# Altium PCB RelayNode.PcbDoc
Units mil, origin at the board's own origin, x right, y up, seen from the top; angles counter-clockwise.
Board outline 2335 x 1930 mil, 2 copper layers (Top Layer, Bottom Layer); 24 components, 27 nets, 101 pads, 0 vias.
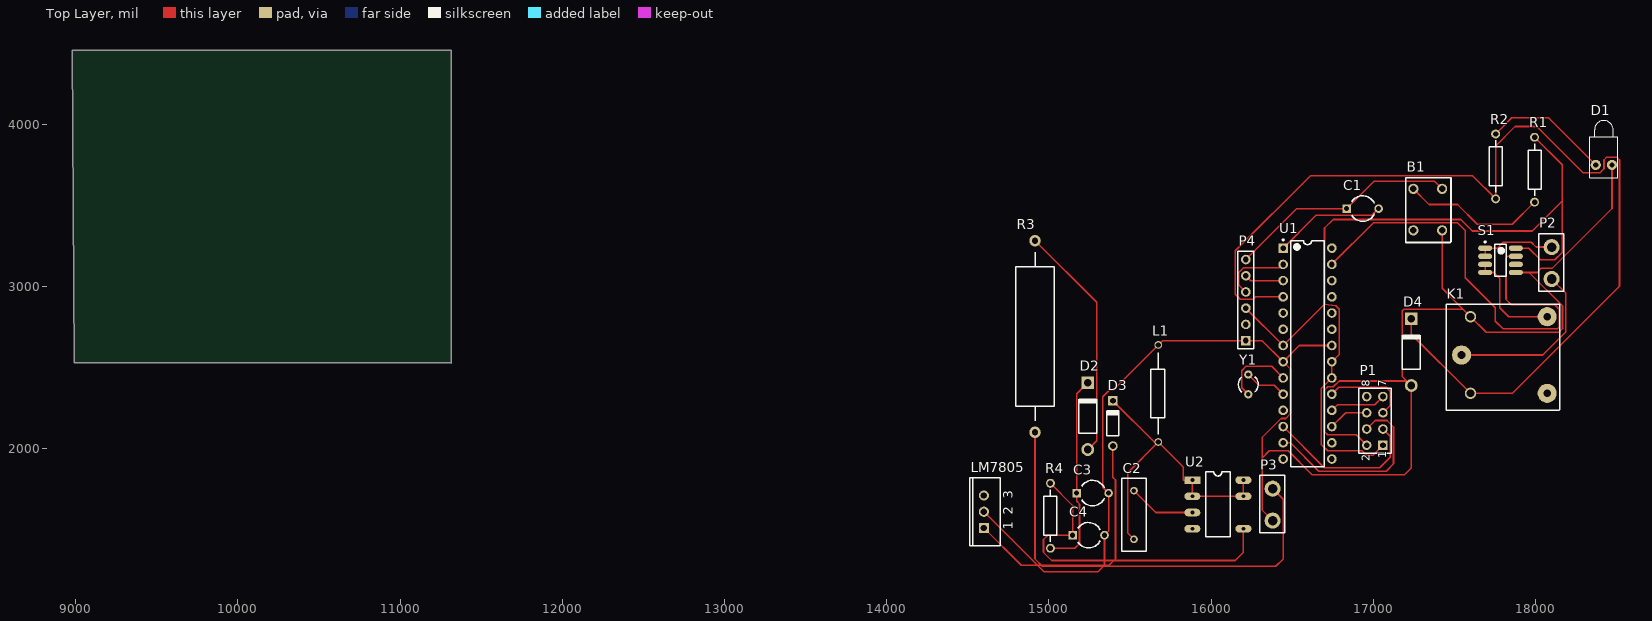
[diagram p0: Top Layer view]
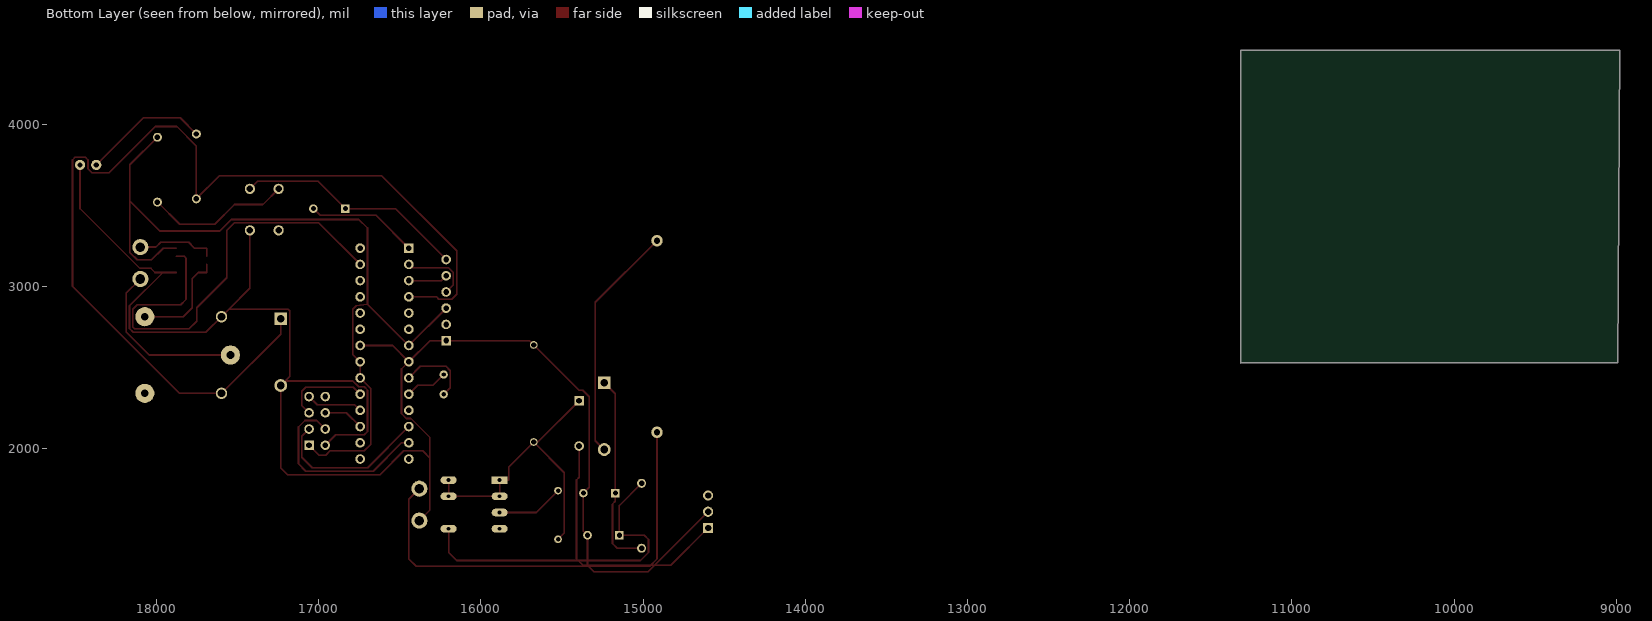
[diagram p1: Bottom Layer view, seen from below]

## Layer stack, top to bottom
Top Layer: signal copper 1.4
Dielectric: dielectric 12.6, FR-4, Dk 4.8
Bottom Layer: signal copper 1.4

## Board outline
8980,4455 11315,4455 11315,2525 11315,2530 8990,2530

## Design rules (kind name [scope] priority, off if disabled: settings)
Clearance [All] p1: gap=10
PolygonConnect [All] p1: connectstyle=Relief reliefconductorwidth=10 reliefentries=4 polygonreliefangle="90 Angle"
RoomDefinition RelayNode [InComponentClass('RelayNode')] p1: confinementstyle=ConfineIn formatcopy=TRUE lockcomponents=FALSE outline 14277.57,1310.39 19497.57,1310.39 19497.57,4045.39 14277.57,4045.39
RoutingLayers [All] p1: top layer_v5=TRUE bottom layer_v5=FALSE
RoutingVias [All] p1: holewidth=28 width=50 viastyle="Through Hole" minholewidth=28 minwidth=50 maxholewidth=28 maxwidth=50
SilkscreenOverComponentPads [All] p1: minsilkscreentomaskgap=10
SolderMaskExpansion [All] p1: expansion=4
Width [All] p1: maxlimit=78.74 minlimit=10 preferedwidth=10
26 further rules are at their usual default settings.

## Components (designator, comment, footprint, x,y, rotation, side; value= is the part's Value field where it differs from the comment)
B1 "Button" Button 17425,3345.91 r90 top
C1 "Cap2" CAPR5-4X5 16935,3480 r0 top
C2 "Cap" RAD-0.3 15525,1590.91 r90 top
C3 "Cap2" CAPR5-4X5 15270,1725.91 r0 top
C4 "Cap2" CAPR5-4X5 15245,1465.91 r0 top
D1 "LED1" LED-1 18422.14,3749.27 r90 top
D2 "Diode 1N4007" DO-41 15240,2200 r90 top
D3 "Diode 1N914" DO-35 15395,2155.91 r90 top
D4 "Diode 1N4001" DO-41 17235,2595 r90 top
K1 "SRD-05VDC-SL-C" SRD-05VDC-SL-C 17600,2340.91 r0 top
L1 "Inductans" "Axial 0.8" 15675,2040.91 r90 top
LM7805 "" TO-220-AB 14600,1610.91 r90 top
P1 "nRF24L01Connector" HDR2X4 17060,2020.91 r90 top
P2 "Screw Terminal" PCBComponent_1 18100,3045.91 r90 top
P3 "Screw Terminal" PCBComponent_1 16380,1555.91 r90 top
P4 "FTDI" HDR1X6 16215,2665.91 r90 top
R1 "Res2" AXIAL-0.4 17995,3720 r90 top
R2 "Res2" AXIAL-0.4 17755,3740 r90 top
R3 "Res2" "Axial 1.0" 14915,2100.91 r90 top
R4 "Res2" AXIAL-0.4 15010,1585.91 r90 top
S1 "ACS712" SOIC127P600X175-8N 17785,3160.91 r0 top
U1 "ATmega328-PU" 28P3 16595,2585.91 r0 top
U2 "LNK302P" "LNK302 - duplicate" 15885,1805.91 r0 top
Y1 "XTAL" R38 16230,2395.91 r0 top

## Footprints (in the part's own frame and the unit in brackets; to place one, negate y for a bottom-side part, rotate by r counter-clockwise, add the part's x,y. Pads: shape width x height; smd on the part's side, far side on the other; paste and mask are expansions set on the pad)
28P3 [mm] "DIP, 28-Leads, Row Spacing 7.62mm, Pitch 2.54mm, Body 34.67x7.3mm"
  rect 1.5x1.5 hole 0.9: 1(-3.81,16.51)
  round 1.5 hole 0.9: 2(-3.81,13.97) 3(-3.81,11.43) 4(-3.81,8.89) 5(-3.81,6.35) 6(-3.81,3.81) 7(-3.81,1.27) 8(-3.81,-1.27) 9(-3.81,-3.81) 10(-3.81,-6.35) 11(-3.81,-8.89) 12(-3.81,-11.43) 13(-3.81,-13.97) 14(-3.81,-16.51) 15(3.81,-16.51) 16(3.81,-13.97) 17(3.81,-11.43) 18(3.81,-8.89) 19(3.81,-6.35) 20(3.81,-3.81) 21(3.81,-1.27) 22(3.81,1.27) 23(3.81,3.81) 24(3.81,6.35) 25(3.81,8.89) 26(3.81,11.43) 27(3.81,13.97) 28(3.81,16.51)
  silkscreen extent -3.93,-17.7 2.65,17.93, body extent -3.6,-17.65 3.6,17.65, height 4.58
"Axial 0.8" [mm]
  round 1.2 hole 0.8: 1(0,0) 2(15.2,0)
  silkscreen extent 1.2,-1.02 14,1.14
"Axial 1.0" [mm]
  round 1.8 hole 1: 1(0,0) 2(30,0)
  silkscreen extent 1.8,-3 28.2,3
AXIAL-0.4 [mm] "Axial Device, Thru-Hole; 2 Leads; 0.4 in Pin Spacing"
  round 1.4 hole 0.85: 1(-5.08,0) 2(5.08,0)
  silkscreen extent -4.06,-1.02 4.06,1.02
Button [mm]
  round 1.6 hole 1: 1(0,4.5) 2(0,0) 3(6.5,4.5) 4(6.5,0)
  silkscreen extent -1.9,-1.4 8.26,5.72
CAPR5-4X5 [mm] "Capacitor; 2 Leads"
  rect 1.35x1.35 hole 0.8: 1(-2.5,0)
  round 1.35 hole 0.8: 2(2.5,0)
  silkscreen extent -1.69,-2 1.82,2
DO-35 [mm] "Diode, Axial; Body 3.8 x 1.9 mm (LxDia. max), Lead Dia. 0.53 mm (max)"
  round 1.5 hole 0.9: 1(-3.55,0)
  rect 1.5x1.5 hole 0.9: 2(3.55,0)
  silkscreen extent -1.95,-0.95 2.05,0.95
DO-41 [mm] "Diode, Axial; Body 5.2 x 2.7 mm (LxDia. max), Lead Dia. 0.86 mm (max)"
  round 2 hole 1.2: 1(-5.23,0)
  rect 2x2 hole 1.2: 2(5.23,0)
  silkscreen extent -2.65,-1.4 2.75,1.4
HDR1X6 [mm] "Connector; Header; 6 Position"
  rect 1.5x1.5 hole 0.9: 1(0,0)
  round 1.5 hole 0.9: 2(2.54,0) 3(5.08,0) 4(7.62,0) 5(10.16,0) 6(12.7,0)
  silkscreen extent -1.27,-1.27 13.97,1.27
HDR2X4 [mm] "Connector; Header; 4x2 Position"
  rect 1.5x1.5 hole 0.9: 1(0,0)
  round 1.5 hole 0.9: 2(0,2.54) 3(2.54,0) 4(2.54,2.54) 5(5.08,0) 6(5.08,2.54) 7(7.62,0) 8(7.62,2.54)
  silkscreen extent -1.27,-1.27 8.89,3.81
LED-1 [mm] "LED; 2 Leads"
  round 1.6 hole 0.8: 1(0,1.27) 2(0,-1.27)
  silkscreen extent -2,-2.2 6.95,2.2
"LNK302 - duplicate" [mm]
  rect 2.5x1.2 hole 0.6: 1(0,0)
  oval 2.5x1.2 hole 0.6: 2(0,-2.54) 3(0,-5.08) 4(0,-7.62) 5(8,-7.62) 7(8,-2.54) 8(8,0)
  silkscreen extent 2.08,-8.89 5.91,1.27
PCBComponent_1 [mm]
  round 2.524 hole 1.5: 1(0,0) 2(5,0)
  silkscreen extent -1.9,-1.91 7.11,2.03
R38 [mm] "Crystal, Thru-Hole; 2 Leads; Body 3.1 x 8.2 mm (Dia.xH)"
  round 1.3 hole 0.7: 1(0,1.55) 2(0,-1.55)
  silkscreen extent -1.55,-1.19 1.55,1.17
RAD-0.3 [mm] "Radial Cap, Thru-Hole; 2 Leads; 0.3 in Pin Spacing"
  round 1.2 hole 0.7: 1(-3.81,0) 2(3.81,0)
  silkscreen extent -5.71,-1.91 5.72,1.91
SOIC127P600X175-8N [mm] "SOIC, 8-Leads, Body 5,0x4,0mm (max), Pitch 1,27mm, IPC Medium Density"
  oval 2.2x0.85 smd: 1(-2.4,0.635) 1(-2.4,1.905) 3(-2.4,-1.905) 3(-2.4,-0.635) 5(2.4,-1.905) 6(2.4,-0.635) 7(2.4,0.635) 8(2.4,1.905)
  silkscreen extent -2.52,-2.5 0.9,3, body extent -2,-2.5 2,2.5, height 1.75
SRD-05VDC-SL-C [mm]
  round 3 hole 1.2: 1(-1.4,6) 2(12,12) 3(12,0)
  round 1.8 hole 1.2: 4(0,12) 5(0,0)
  silkscreen extent -3.81,-2.67 13.97,13.97
TO-220-AB [mm] "TO, Thru-Hole, Vertical, Heatsink Mounted; 3 In-Line Leads; Pitch 2.54 mm"
  rect 1.6x1.6 hole 1: 1(-2.54,0)
  round 1.6 hole 1: 2(0,0) 3(2.54,0)
  silkscreen extent -5.35,-2.55 5.35,2.25

## Part data
C1 C2 C3 C4: "Capacitor"
D1: "Typical RED GaAs LED"
D2 D4: "1 Amp General Purpose Rectifier"
D3: "High Conductance Fast Diode"
LM7805: library part LM7805
P2 P3: "Screw Terminal Block Connector 2 Pins"
P4: library part "Header 6", "Header, 6-Pin"
R1 R2 R3 R4: "Resistor"
U1: "8-bit AVR Microcontroller, 32KB Flash, 1KB EEPROM, 2KB SRAM, 28-pin PDIP, Industrial Grade (-40°C to 85°C)"
U2: "LNK302P DIP"
Y1: "Crystal Oscillator"

## Nets (pads, with @x,y where several pads share a name; then routed paths per layer and width w, separated by ;. In a path a pad name is that pad's centre, name@x,y a point inside that pad or via, vN(x,y) a via of type N, cw(c..) or ccw(c..) an arc to the next point about the centre after c; other vN are vias at no path point)
GND: B1.2 C3.2 C4.2 D1.2 D4.1 K1.4 L1.2 LM7805.2 P1.2 P3.1 P4.1 S1.5 U1.8 U1.22 | length 10888.5
  Top Layer w10: LM7805.2 14970.91,1240 15303.43,1240 15343.43,1280 C4.2 15368.43,1490.91 C3.2 15333,1761.33 15333,2320 15373,2360 15395.67,2360 L1.2 15701.58,2665.91 P4.1 16315,2665.91 U1.8 ; P3.1 16315,1620.91 16315,1941 ; U1.22 16545,2635.91 U1.8 ; P1.2 16895.91,2085 16720,2085 16700,2105 16700,2361 16720,2381 16754,2381 16790,2417 17207.09,2417 ; B1.2 17425,2988.35 17553.35,2860 ; S1.5 17961.09,3085.91 ; D1.2 18472.14,3480.14 18103,3111 18035,3111 18009.91,3085.91 17961.09,3085.91 ; 16315,1941 16315,2069 16432,2186 16460,2186 16490,2216 16490,2490.91 U1.8 ; 16315,1941 16360,1986 16476,1986 16622,1840 17195,1840 17235,1880 D4.1 17207.09,2417 ; 17207.09,2417 17180,2444.09 17180,2850 17190,2860 17553.35,2860 ; 17553.35,2860 K1.4 17696.35,2717 18144,2717 18167,2740 18167,2880 17961.09,3085.91
NetB1_3: B1.3 R1.1 | length 894.5
  Top Layer w10: B1.3 17344.65,3505 17520,3505 17642,3383 17858,3383 R1.1
NetB1_4: B1.4 C1.1 P4.6 | length 1429.6
  Top Layer w10: P4.6 16529.09,3480 C1.1 17005.57,3649 17377.81,3649 B1.4
NetC1_2: C1.2 U1.1 | length 689.5
  Top Layer w10: U1.1 16647.13,3438.03 16991.46,3438.03 C1.2
NetC2_1: C2.1 D3.2 L1.1 U2.1 U2.2 U2.7 U2.8 | length 1949.1
  Top Layer w10: D3.2 15649.76,2040.91 L1.1 ; C2.1 15486,1479.91 15486,1851.91 L1.1 ; U2.8 U2.7 U2.2 U2.1 15830,1805.91 15830,1885.91 L1.1
NetC2_2: C2.2 U2.3 | length 415.9
  Top Layer w10: C2.2 15660,1605.91 U2.3
NetC3_1: C3.1 D2.2 R4.1 | length 1217.5
  Top Layer w10: R4.1 15159.91,1385.91 15189,1415 15189,1658 15171.57,1675.43 C3.1 15171.57,2337.48 D2.2
NetC4_1: C4.1 R4.2 U2.5 | length 2067.2
  Top Layer w10: R4.2 15146.57,1649.33 C4.1 14992.91,1465.91 14967,1440 14967,1360 15017,1310 16149,1310 16199,1360 16199,1505.91 U2.5
NetD1_1: D1.1 R2.2 | length 779
  Top Layer w10: R2.2 17855,4040 18081.41,4040 D1.1
NetD2_1: D2.1 R3.2 | length 1468.1
  Top Layer w10: R3.2 15295,2902.01 15295,2049.09 D2.1
NetD3_1: D3.1 LM7805.1 | length 1626
  Top Layer w10: LM7805.1 14830.91,1280 15371,1280 15411,1320 15411,1807 15395,1823 D3.1
NetD4_2: D4.2 K1.5 R2.1 U1.4 | length 6356.3
  Top Layer w10: U1.4 16274.91,2935.91 16260,2921 16180,2921 16150,2951 16150,3220 16613,3683 17612,3683 R2.1 17755,3866 17875,3986 18008,3986 18292,3702 18400,3702 18423,3725 18423,3780 18439,3796 18503,3796 18519,3780 18519,3001 17858.91,2340.91 K1.5 17235,2705.91 D4.2
NetK1_1: K1.1 P2.1 | length 1063.8
  Top Layer w10: K1.1 18045.13,2577.13 18187,2719 18187,2958.91 P2.1
NetK1_2: K1.2 S1.3 | length 650.3
  Top Layer w10: S1.3@17690.51,3135.91 17690.51,3085.91 17743.09,3085.91 17780.28,3048.72 17780.28,2868.72 17835.65,2813.35 K1.2
NetP1_3: P1.3 U1.12 | length 984.6
  Top Layer w10: U1.12 16698.91,1882 17040,1882 17105,1947 17105,2075.91 P1.3
NetP1_4: P1.4 U1.13 | length 1201.2
  Top Layer w10: U1.13 16490.09,2035.91 16665,1861 17080,1861 17125,1906 17125,2133 17085,2173 17012.09,2173 P1.4
NetP1_5: P1.5 U1.19 | length 538.5
  Top Layer w10: U1.19 16787.09,2378 17080,2378 17105,2353 17105,2265.91 P1.5
NetP1_6: P1.6 U1.17 | length 250.2
  Top Layer w10: U1.17 16830,2220.91 P1.6
NetP1_7: P1.7 U1.18 | length 350.2
  Top Layer w10: U1.18 16780.09,2271 17010.09,2271 P1.7
NetP2_2: P2.2 S1.1 | length 486.6
  Top Layer w10: S1.1@17690.51,3185.91 17690.51,3235.91 17766,3235.91 17802.09,3272 17975,3272 18004.24,3242.76 P2.2
NetP3_2: P3.2 R3.1 | length 2807.9
  Top Layer w10: R3.1 14915,1320 14960,1275 16400,1275 16445,1320 16445,1687.76 P3.2
NetP4_4: P4.4 U1.2 | length 433.8
  Top Layer w10: P4.4 16170,3010.91 16170,3085 16200,3115 16424.09,3115 U1.2
NetP4_5: P4.5 U1.3 | length 242.4
  Top Layer w10: P4.5 16245,3035.91 U1.3
NetS1_7: S1.7 U1.27 | length 2785.1
  Top Layer w10: U1.27 17002.09,3393 17520,3393 17568,3345 17568,3054 17753,2869 17753,2786 17800,2739 18136,2739 18146.5,2749.5 18146.5,2860 18119.09,2887.4 17851.6,2887.4 17819,2920 17819,3174.91 17830,3185.91 S1.7
NetU1_9: U1.9 Y1.2 | length 458.7
  Top Layer w10: Y1.2 16189,2375.88 16189,2480 16216,2507 16373.91,2507 U1.9
NetU1_10: U1.10 Y1.1 | length 265.1
  Top Layer w10: Y1.1 16296.02,2390.91 16390,2390.91 U1.10
VCC: P1.1 P4.3 R1.2 S1.8 U1.7 U1.20 U1.21 | length 5274.9
  Top Layer w10: P4.3 U1.7 16700,2890.91 ; P1.1 16999.09,1960 16957.09,1960 16931.09,1986 16720,1986 16680,2026 16680,2370.91 U1.20 U1.21 16790,2580.91 16790,2860 16769,2881 16700,2890.91 ; S1.8 17960,3235.91 18031.91,3164 18120,3164 18165,3209 18165,3527 ; R1.2 18165,3750 18165,3527 ; 16700,2890.91 16700,3360 16753,3413 17540,3413 17611,3342 17980,3342 18165,3527
pads on no net: B1.1 K1.3 LM7805.3 P1.8 P4.2 S1.6 U1.5 U1.6 U1.11 U1.14 U1.15 U1.16 U1.23 U1.24 U1.25 U1.26 U1.28 U2.4

## Text inside footprints (layer, text, board x,y; h text height)
LM7805: Top Overlay "3" at 14778.15,1691.22 h59.06 r90; Top Overlay "2" at 14778.15,1591.22 h59.06 r90; Top Overlay "1" at 14778.15,1501.06 h59.06 r90
P1: Top Overlay "8" at 16980,2380.91 h50 r90; Top Overlay "7" at 17080,2380.91 h50 r90; Top Overlay "1" at 17080,1940.91 h50 r90; Top Overlay "2" at 16980,1920.91 h50 r90